# Altium PCB Remote Base.PcbDoc
Units mil, origin at the board's own origin, x right, y up, seen from the top; angles counter-clockwise.
Board outline 1997.02 x 4473.45 mil, 2 copper layers (Top Layer, Bottom Layer); 26 components, 31 nets, 178 pads, 17 vias.
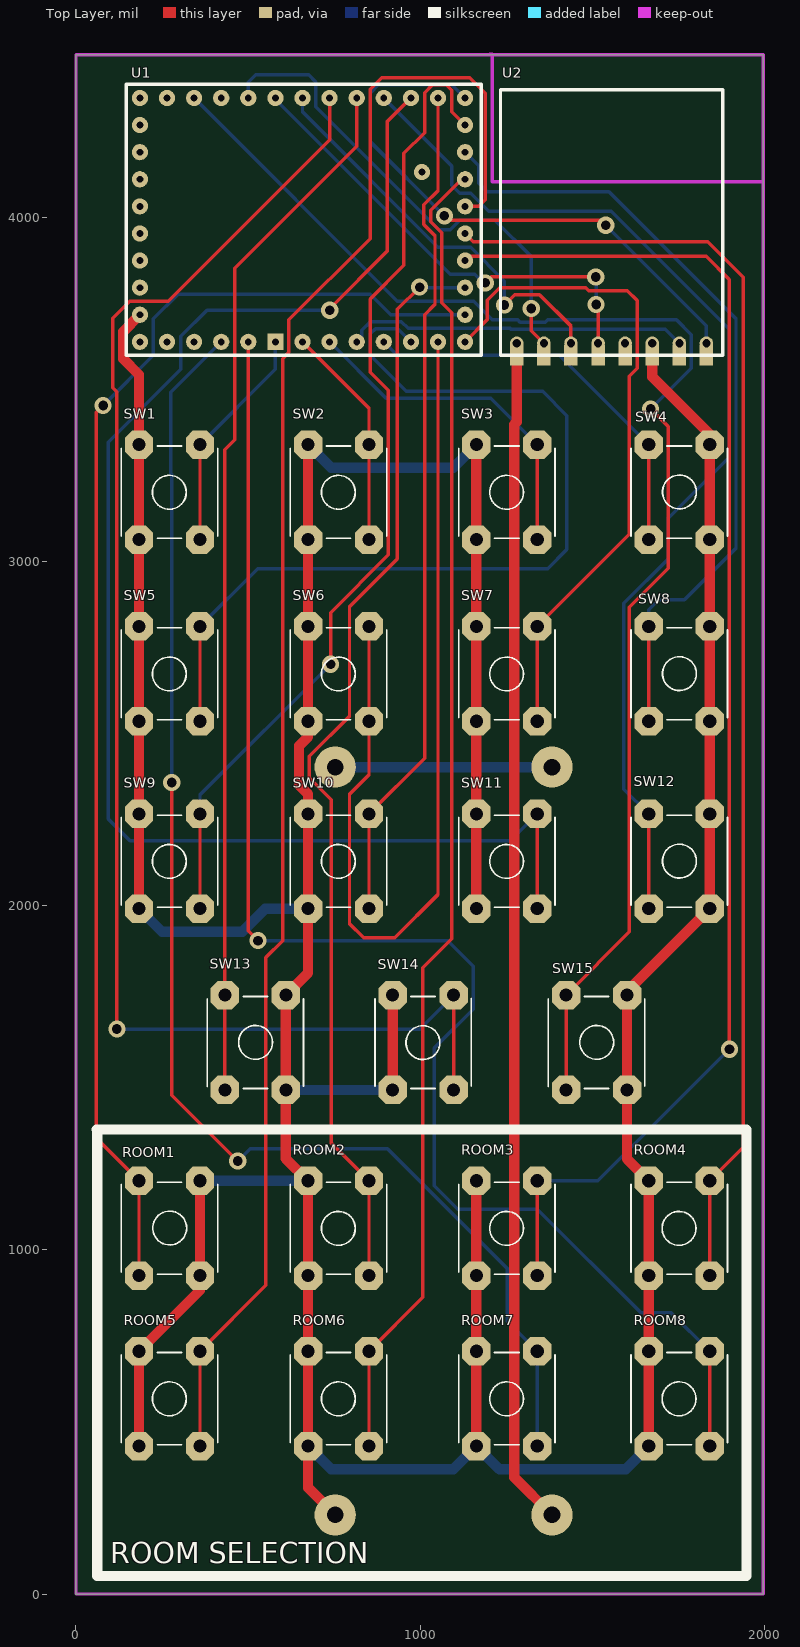
[diagram p0: Top Layer view]
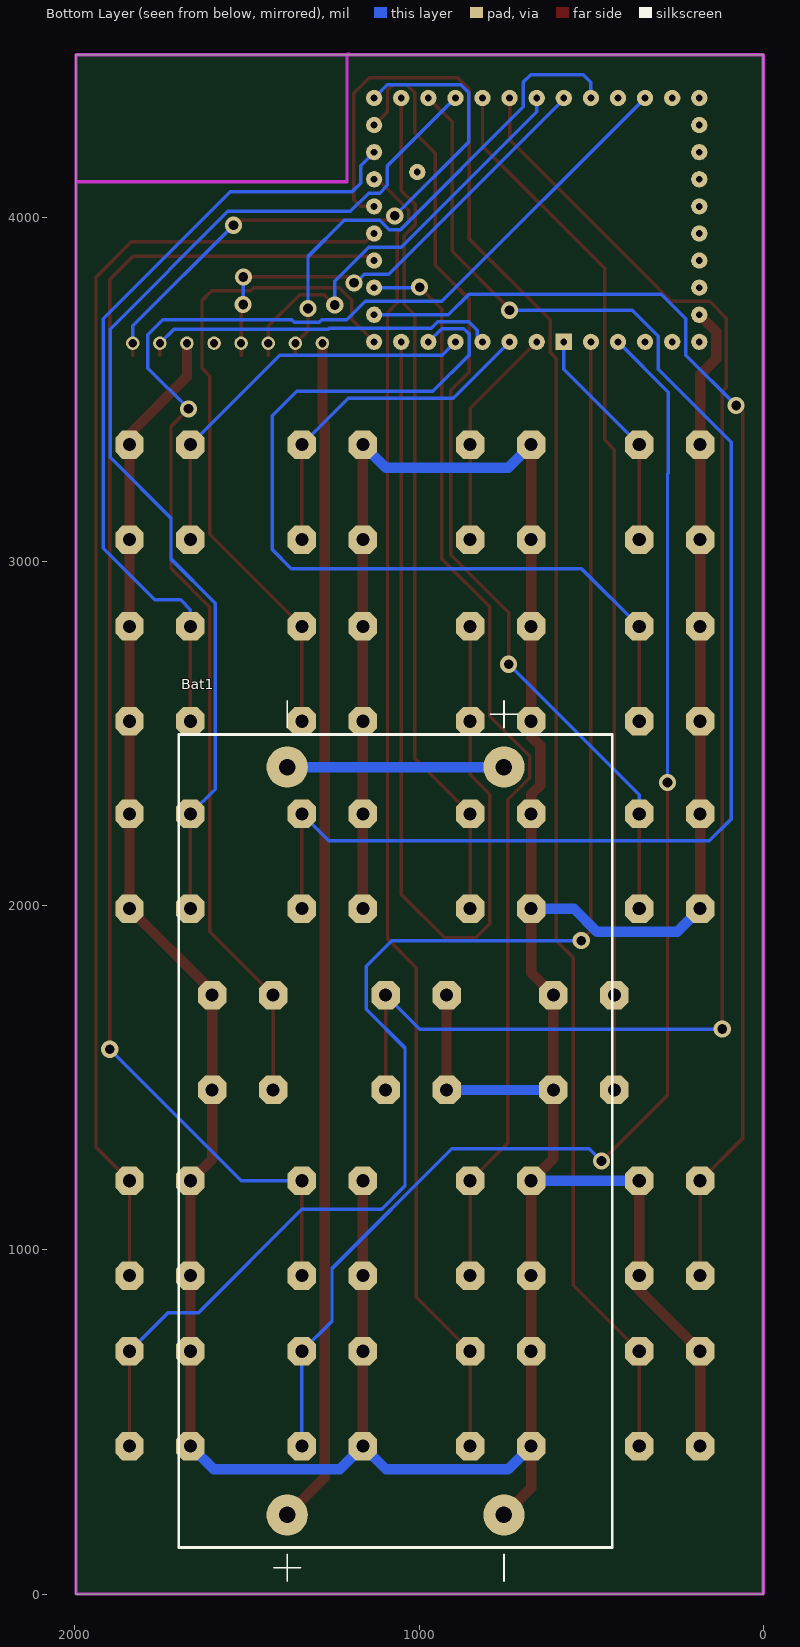
[diagram p1: Bottom Layer view, seen from below]
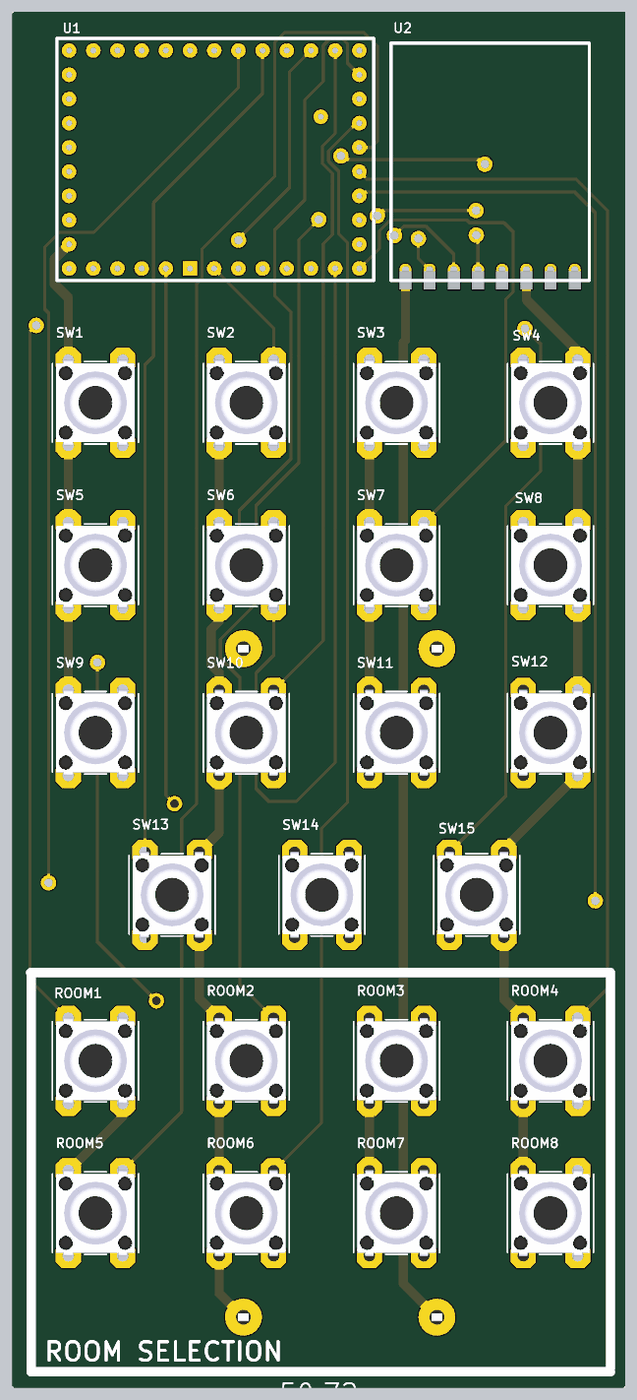
[diagram p2: 3D render of the assembled board from above, using the file's embedded part models]

## Layer stack, top to bottom
Top Solder: solder mask 0.4, Solder Resist, Dk 3.5
Top Layer: signal copper 1.4
Dielectric 1: dielectric 12.6, FR-4, Dk 4.8
Bottom Layer: signal copper 1.4
Bottom Solder: solder mask 0.4, Solder Resist, Dk 3.5

## Board outline
0,0 0,4473.45 1997.02,4473.45 1997.02,0 0,0

## Design rules (kind name [scope] priority, off if disabled: settings)
Clearance [All] p1: gap=10
PolygonConnect [All] p1: connectstyle=Relief reliefconductorwidth=10 reliefentries=4 polygonreliefangle="90 Angle" airgapwidth=10
RoomDefinition "Remote Base" [InComponentClass('Remote Base')] p1: confinementstyle=ConfineIn formatcopy=TRUE lockcomponents=FALSE outline 0,0 1997.02,0 1997.02,4473.45 0,4473.45
RoutingVias [All] p1: holewidth=28 width=50 viastyle="Through Hole" minholewidth=28 minwidth=50 maxholewidth=28 maxwidth=50
SolderMaskExpansion [All] p1: expansion=4
UnpouredPolygon [All] p1: allowunpoured=FALSE
Width POWER [InNet('NetBat1_C1+','NetBat1_C1-','3V','GND')] p1: maxlimit=30 minlimit=10 preferedwidth=30
Width GENERAL [All] p2: maxlimit=20 minlimit=10 preferedwidth=10
29 further rules are at their usual default settings.

## Components (designator, comment, footprint, x,y, rotation, side; value= is the part's Value field where it differs from the comment)
Bat1 "NiMH-AA x 2" BATT_HOLDER_2XAA 1068.26,1316.29 r90 bottom
ROOM1 "Push Button Switch" "Push Button Switch" 271.72,1063.03 r270 top
ROOM2 "Push Button Switch" "Push Button Switch" 762.94,1063.03 r90 top
ROOM3 "Push Button Switch" "Push Button Switch" 1251.89,1063.03 r90 top
ROOM4 "Push Button Switch" "Push Button Switch" 1752.99,1063.03 r90 top
ROOM5 "Push Button Switch" "Push Button Switch" 271.72,567.67 r90 top
ROOM6 "Push Button Switch" "Push Button Switch" 762.94,567.67 r90 top
ROOM7 "Push Button Switch" "Push Button Switch" 1251.89,567.67 r90 top
ROOM8 "Push Button Switch" "Push Button Switch" 1752.99,567.67 r90 top
SW1 "Push Button Switch" "Push Button Switch" 271.72,3201.91 r90 top
SW2 "Push Button Switch" "Push Button Switch" 762.94,3201.91 r90 top
SW3 "Push Button Switch" "Push Button Switch" 1251.89,3201.91 r90 top
SW4 "Push Button Switch" "Push Button Switch" 1752.99,3201.91 r270 top
SW5 "Push Button Switch" "Push Button Switch" 271.72,2674.02 r90 top
SW6 "Push Button Switch" "Push Button Switch" 762.94,2674.02 r90 top
SW7 "Push Button Switch" "Push Button Switch" 1251.89,2674.02 r90 top
SW8 "Push Button Switch" "Push Button Switch" 1752.99,2674.02 r270 top
SW9 "Push Button Switch" "Push Button Switch" 271.72,2129.24 r90 top
SW10 "Push Button Switch" "Push Button Switch" 762.94,2129.24 r90 top
SW11 "Push Button Switch" "Push Button Switch" 1251.89,2129.24 r90 top
SW12 "Push Button Switch" "Push Button Switch" 1752.99,2129.24 r270 top
SW13 "Push Button Switch" "Push Button Switch" 521.17,1602.63 r270 top
SW14 "Push Button Switch" "Push Button Switch" 1008.73,1602.63 r90 top
SW15 "Push Button Switch" "Push Button Switch" 1512.68,1602.63 r270 top
U1 "STM8L052C6 Board" "STM8L052C6 BOARD" 145.87,3599.69 r0 top
U2 "CC2500" CC2500 1280.87,3634.69 r0 top

## Footprints (in the part's own frame and the unit in brackets; to place one, negate y for a bottom-side part, rotate by r counter-clockwise, add the part's x,y. Pads: shape width x height; smd on the part's side, far side on the other; paste and mask are expansions set on the pad)
BATT_HOLDER_2XAA [mil] "2-cell AA battery holder"
  round 120 hole 48: C1+(-1086.61,314.96) C1-(1086.61,314.96) C2+(1086.61,-314.96) C2-(-1086.61,-314.96)
  silkscreen extent -1280,-630 1280,630, body extent -1181,-630 1181,630, height 657
CC2500 [mm]
  rect 1x1.5 smd: 1(0,-0.889) 2(2,-0.889) 3(4,-0.889) 4(6,-0.889) 5(8,-0.889) 6(10,-0.889) 7(12,-0.889) 8(14,-0.889)
  round 1 hole 0.6: 1(0,0) 2(2,0) 3(4,0) 4(6,0) 5(8,0) 6(10,0) 7(12,0) 8(14,0)
  silkscreen extent -1.2,-0.89 15.2,18.71
"Push Button Switch" [mm]
  round 0.508 on Mech15: 0(0,0)
  oct 2.1x2.1 hole 0.965: 1(-3.5,-2.25) 2(-3.5,2.25) 3(3.5,2.25) 4(3.5,-2.25)
  silkscreen extent -3.4,-3.56 3.4,3.56, body extent -4.13,-3.25 4.13,3.25, height 5
"STM8L052C6 BOARD" [mm]
  rect 1.2x1.2 hole 0.5: 1(11.014,0.987)
  round 1.2 hole 0.5: 2(13.014,0.987) 3(15.014,0.987) 4(17.014,0.987) 5(19.014,0.987) 6(21.014,0.987) 7(23.014,0.987) 8(25.014,0.987) 9(25.014,2.987) 10(25.014,4.987) 11(25.014,6.987) 12(25.014,8.987) 13(25.014,10.987) 14(25.014,12.987) 15(25.014,14.987) 16(25.014,16.987) 17(25.014,18.987) 18(23.014,18.987) 19(21.014,18.987) 20(19.014,18.987) 21(17.014,18.987) 22(15.014,18.987) 23(13.014,18.987) 24(11.014,18.987) 25(9.014,18.987) 26(7.014,18.987) 27(5.014,18.987) 28(3.014,18.987) 29(1.014,18.987) 30(1.014,16.987) 31(1.014,14.987) 32(1.014,12.987) 33(1.014,10.987) 34(1.014,8.987) 35(1.014,6.987) 36(1.014,4.987) 37(1.014,2.987) 38(1.014,0.987) 39(3.014,0.987) 40(5.014,0.987) 41(7.014,0.987) 42(9.014,0.987) 43(21.827,13.518)
  silkscreen extent 0,0 26.21,19.99

## Part data
Bat1: library part BATT_AAx2_Holder, "Battery holder 2xAA PCB mount"

## Via types
v1: diameter 50, hole 28, Top Layer to Bottom Layer, 17 vias

## Nets (pads, with @x,y where several pads share a name; then routed paths per layer and width w, separated by ;. In a path a pad name is that pad's centre, name@x,y a point inside that pad or via, vN(x,y) a via of type N, cw(c..) or ccw(c..) an arc to the next point about the centre after c; other vN are vias at no path point)
3V: Bat1.C1+ U2.1 | length 3453.2
  Top Layer w30: U2.1@1280.87,3634.69 1280.87,3599.69 1280.87,3405.69 1273.87,3398.69 1273.87,339.03 Bat1.C1+
CSN: U1.17 U2.8 | length 1726.9
  Top Layer w10: v1(1070.52,4004.54) 1082.94,3992.13 1524.79,3992.13 v1(1539.3,3977.62) ; U2.8@1832.05,3599.69 U2.8@1832.05,3634.68
  Bottom Layer w10: v1(1070.52,4004.54) 855.83,4219.23 855.83,4363.2 878.45,4385.83 1092.05,4385.83 U1.17 ; v1(1539.3,3977.62) 1832.05,3684.87 U2.8@1832.05,3634.69
GDO0: U1.4 U2.7 | length 1033.6
  Top Layer w10: U2.7@1753.31,3599.69 U2.7@1753.31,3634.68
  Bottom Layer w10: U1.4 830.64,3653.47 830.64,3671.94 855.87,3697.17 945.59,3697.17 965.07,3677.69 1261.31,3677.69 1263.31,3675.69 1712.31,3675.69 U2.7@1753.31,3634.69
GND: Bat1.C2- ROOM1.2 ROOM1.3 ROOM2.2 ROOM2.3 ROOM3.2 ROOM3.3 ROOM4.2 ROOM4.3 ROOM5.2 ROOM5.3 ROOM6.2 ROOM6.3 ROOM7.2 ROOM7.3 ROOM8.2 ROOM8.3 SW1.2 SW1.3 SW2.2 SW2.3 SW3.2 SW3.3 SW4.2 SW4.3 SW5.2 SW5.3 SW6.2 SW6.3 SW7.2 SW7.3 SW8.2 SW8.3 SW9.2 SW9.3 SW10.2 SW10.3 SW11.2 SW11.3 SW12.2 SW12.3 SW13.2 SW13.3 SW14.2 SW14.3 SW15.2 SW15.3 U1.37 U2.6 | length 14438.7
  Top Layer w30: ROOM5.2 ROOM5.3 360.3,882.64 ROOM1.3 ROOM1.2 ; SW9.2 SW9.3 SW5.2 SW5.3 SW1.2 SW1.3 183.14,3543.42 136.87,3589.69 136.87,3668.36 U1.37 ; SW2.3 SW2.2 SW6.3 SW6.2 674.36,2490.8 648.3,2464.74 648.3,2350.01 674.36,2323.96 SW10.3 SW10.2 674.36,1805.03 SW13.2 SW13.3 609.75,1265.43 ROOM2.3 ROOM2.2 ROOM6.3 ROOM6.2 674.36,308.62 Bat1.C2- ; SW14.2 SW14.3 ; ROOM7.2 ROOM7.3 ROOM3.2 ROOM3.3 ; SW11.2 SW11.3 SW7.2 SW7.3 SW3.2 SW3.3 ; ROOM8.2 ROOM8.3 ROOM4.2 ROOM4.3 1601.26,1263.97 SW15.3 SW15.2 1601.26,1751.13 SW12.3 SW12.2 SW8.3 SW8.2 SW4.3 SW4.2 1841.57,3370.24 1674.57,3537.24 1674.57,3599.69 U2.6@1674.57,3634.69
  Bottom Layer w30: SW9.2 249.9,1924.69 483.11,1924.69 549.87,1991.44 SW10.2 ; ROOM1.2 ROOM2.3 ; SW13.3 SW14.2 ; ROOM6.2 741.55,362.69 1096.12,362.69 ROOM7.2 1230.5,362.69 1597.21,362.69 ROOM8.2 ; SW2.3 741.38,3272.69 1096.29,3272.69 SW3.3
NetBat1_C1-: Bat1.C1- Bat1.C2+ | length 629.9
  Bottom Layer w30: Bat1.C2+ Bat1.C1-
ROOM1: ROOM1.1 ROOM1.4 U1.9 | length 3860.9
  Top Layer w10: v1(78.87,3453.69) 58.87,3433.69 58.87,1325.09 ROOM1.1 ROOM1.4
  Bottom Layer w10: v1(78.87,3453.69) 224.87,3599.69 224.87,3705.69 296.35,3777.17 854.87,3777.17 914.75,3717.28 U1.9
ROOM2: ROOM2.1 ROOM2.4 U1.10 | length 3209.7
  Top Layer w10: ROOM2.1 ROOM2.4 741.87,1310.48 741.87,2308.27 678.3,2371.83 678.3,2434.12 794.87,2550.69 794.87,2868.69 933.87,3007.69 933.87,3733.02 v1(998.53,3797.69)
  Bottom Layer w10: v1(998.53,3797.69) 1000.19,3796.02 U1.10
ROOM3: ROOM3.1 ROOM3.4 U1.11 | length 4030.3
  Top Layer w10: U1.11 1143.11,3887.2 1831.36,3887.2 1898.87,3819.69 v1(1898.87,1582.94) ; ROOM3.1 ROOM3.4
  Bottom Layer w10: ROOM3.4 1516.75,1200.83 v1(1898.87,1582.94)
ROOM4: ROOM4.1 ROOM4.4 U1.12 | length 3802.5
  Top Layer w10: U1.12 1154.79,3929.39 1836.17,3929.39 1938.87,3826.69 1938.87,1298.13 ROOM4.4 ROOM4.1
ROOM5: ROOM5.1 ROOM5.4 U1.13 | length 4890.6
  Top Layer w10: ROOM5.1 ROOM5.4 551.87,897.04 551.87,1849.69 600.87,1898.69 600.87,3589.69 618.87,3607.69 618.87,3702.69 854.87,3938.69 854.87,4372.69 888.01,4405.83 1144.73,4405.83 1189.3,4361.26 1189.3,4051.62 1169.93,4032.25 U1.13
ROOM6: ROOM6.1 ROOM6.4 U1.14 | length 3853.6
  Top Layer w10: ROOM6.1 ROOM6.4 1007.87,861.82 1007.87,1819.69 1091.87,1903.69 1091.87,3723.5 1063.29,3752.08 1063.29,3955.21 1030.52,3987.97 1030.52,4021.11 1120.4,4110.99 U1.14
ROOM7: ROOM7.1 ROOM7.4 U1.41 | length 4016
  Top Layer w10: v1(278.13,2357.96) 278.13,1449.95 v1(469.99,1258.09)
  Bottom Layer w10: v1(278.13,2357.96) 278.13,3254.11 275.68,3256.56 275.68,3492.21 U1.41 ; v1(469.99,1258.09) 505.82,1293.92 905.23,1293.92 1253.14,946.01 1253.14,792.81 ROOM7.4 ROOM7.1
ROOM8: ROOM8.1 ROOM8.4 U1.42 | length 4367.7
  Top Layer w10: U1.42 500.75,1926.8 v1(528.87,1898.69) ; ROOM8.1 ROOM8.4
  Bottom Layer w10: v1(528.87,1898.69) 1079.87,1898.69 1153.87,1824.69 1153.87,1699.69 1040.87,1586.69 1040.87,1186.56 1108.93,1118.5 1340.44,1118.5 1642.25,816.69 1730.35,816.69 ROOM8.4
SCLK: U1.23 U2.3 | length 1229.1
  Top Layer w10: v1(1244.83,3745.69) 1275.17,3776.03 1346.96,3776.03 1438.35,3684.64 1438.35,3634.69 U2.3@1438.35,3599.69
  Bottom Layer w10: U1.23 658.23,4306.73 1051.57,3913.39 1146.67,3913.39 1244.83,3815.23 v1(1244.83,3745.69)
SI: U1.25 U2.2 | length 1462.7
  Top Layer w10: v1(1322.87,3735.69) 1322.87,3671.43 1359.61,3634.69 U2.2@1359.61,3599.69
  Bottom Layer w10: U1.25 500.75,4392.72 522.72,4414.69 675.87,4414.69 696.87,4393.69 696.87,4321.63 1053.95,3964.54 1087.09,3964.54 1114.68,3992.13 1217.43,3992.13 1322.87,3886.69 v1(1322.87,3735.69)
SO: U1.24 U2.4 | length 1393.4
  Top Layer w10: v1(1189.3,3809.98) 1206.52,3827.2 v1(1510.64,3827.2) ; v1(1511.38,3747.2) 1517.09,3741.49 1517.09,3634.69 U2.4@1517.09,3599.69
  Bottom Layer w10: U1.24 579.49,4343.04 1087.89,3834.65 1158.84,3834.65 1183.51,3809.98 v1(1189.3,3809.98) ; v1(1510.64,3827.2) 1511.38,3826.46 v1(1511.38,3747.2)
SW1: SW1.1 SW1.4 U1.1 | length 665.2
  Top Layer w10: SW1.1 SW1.4
  Bottom Layer w10: SW1.4 579.49,3558.89 U1.1
SW2: SW2.1 SW2.4 U1.2 | length 654.5
  Top Layer w10: U1.2 851.52,3445.25 SW2.4 SW2.1
SW3: SW3.1 SW3.4 U1.3 | length 1002.9
  Top Layer w10: SW3.1 SW3.4
  Bottom Layer w10: U1.3 900.83,3474.69 1205.49,3474.69 SW3.4
SW4: SW4.1 SW4.4 U1.5 | length 1169.3
  Top Layer w10: SW4.4 SW4.1
  Bottom Layer w10: U1.5 933.31,3599.69 1404.42,3599.69 SW4.1
SW5: SW5.1 SW5.4 U1.6 | length 2670.5
  Top Layer w10: SW5.1 SW5.4
  Bottom Layer w10: SW5.4 528.17,2979.69 1371.14,2979.69 1426.64,3035.19 1426.64,3423.91 1355.87,3494.69 959.87,3494.69 854.87,3599.69 854.87,3661.69 870.35,3677.17 934.57,3677.17 U1.6
SW6: SW6.1 SW6.4 U1.7 | length 2819.7
  Top Layer w10: SW6.4 SW6.1 851.52,2380.34 794.87,2323.69 794.87,1947.69 835.87,1906.69 925.87,1906.69 1051.93,2032.75 U1.7
SW7: SW7.1 SW7.4 U1.8 | length 1956.6
  Top Layer w10: U1.8 1195.57,3703.44 1195.57,3759.69 1231.92,3796.03 1480.8,3796.03 1489.63,3787.2 1602.36,3787.2 1630.87,3758.69 1630.87,3561.69 1607.87,3538.69 1607.87,3079.21 SW7.4 SW7.1
SW8: SW8.1 SW8.4 U1.15 | length 2336
  Top Layer w10: SW8.4 SW8.1
  Bottom Layer w10: U1.15 1169.87,4150.53 1169.87,4099.69 1194.87,4074.69 1548.87,4074.69 1917.91,3705.65 1917.91,3038.72 1768.25,2889.07 1692.99,2889.07 1664.4,2860.48 SW8.1
SW9: SW9.1 SW9.4 U1.16 | length 2898.2
  Top Layer w10: SW9.1 SW9.4 ; v1(739.87,2701.69) 739.87,2851.69 907.87,3019.69 907.87,3497.69 854.87,3550.69 854.87,3763.15 952.87,3861.15 952.87,4186.69 1012.87,4246.69 1012.87,4362.83 1035.87,4385.83 1075.87,4385.83 1091.87,4369.83 1091.87,4307.27 U1.16
  Bottom Layer w10: SW9.4 360.3,2322.12 v1(739.87,2701.69)
SW10: SW10.1 SW10.4 U1.18 | length 2465.9
  Top Layer w10: SW10.1 SW10.4 1012.87,2428.38 1012.87,3717.69 1043.29,3748.11 1043.29,3946.92 1010.52,3979.69 1010.52,4036.49 1051.93,4077.9 U1.18
SW11: SW11.1 SW11.4 U1.19 | length 4249.6
  Top Layer w10: v1(737.25,3730.69) 737.25,3735.06 903.87,3901.69 903.87,4277.88 U1.19 ; SW11.1 SW11.4
  Bottom Layer w10: v1(737.25,3730.69) 380.79,3730.69 304.65,3654.54 304.65,3558.47 93.51,3347.33 93.51,2252.08 156.95,2188.65 1262.08,2188.65 SW11.4
SW12: SW12.1 SW12.4 U1.20 | length 3155.1
  Top Layer w10: SW12.4 SW12.1
  Bottom Layer w10: U1.20 1092.05,4149.61 1092.05,4093.49 1114.68,4070.87 1146.67,4070.87 1199.92,4017.62 1555.86,4017.62 1897.91,3675.58 1897.91,3302.72 1720.87,3125.69 1720.87,3007.69 1592.32,2879.13 1592.32,2339.12 SW12.1
SW13: SW13.1 SW13.4 U1.21 | length 3041.1
  Top Layer w10: SW13.4 SW13.1 432.59,3325.4 460.87,3353.69 460.87,3852.69 815.71,4207.53 U1.21
SW14: SW14.1 SW14.4 U1.22 | length 4332
  Top Layer w10: v1(118.87,1641.69) 118.87,3493.69 106.87,3505.69 106.87,3707.69 155.87,3756.69 267.87,3756.69 736.97,4225.79 U1.22 ; SW14.1 SW14.4
  Bottom Layer w10: v1(118.87,1641.69) 998.57,1641.69 SW14.4
SW15: SW15.1 SW15.4 U1.27 | length 4123.1
  Top Layer w10: SW15.4 SW15.1 1607.87,1924.2 1607.87,2867.69 1720.87,2980.69 1720.87,3392.69 v1(1669.87,3443.69)
  Bottom Layer w10: U1.27 933.79,3756.69 1155.87,3756.69 1209.87,3702.69 1283.31,3702.69 1290.31,3695.69 1363.31,3695.69 1370.31,3702.69 1745,3702.69 1788,3659.69 1788,3561.81 v1(1669.87,3443.69)
pads on no net: ROOM1.0 ROOM2.0 ROOM3.0 ROOM4.0 ROOM5.0 ROOM6.0 ROOM7.0 ROOM8.0 SW1.0 SW2.0 SW3.0 SW4.0 SW5.0 SW6.0 SW7.0 SW8.0 SW9.0 SW10.0 SW11.0 SW12.0 SW13.0 SW14.0 SW15.0 U1.26 U1.28 U1.29 U1.30 U1.31 U1.32 U1.33 U1.34 U1.35 U1.36 U1.38 U1.39 U1.40 U1.43 U2.5

## Keep-outs
Keep-Out Layer:
  lines w10: 1202.72,4475.09 1209.52,4475.09 1209.52,4103.74 1995.73,4103.74 ; 0,0 0,4473.45 1997.02,4473.45 1997.02,0 0,0

## Silkscreen, mask and mechanical layers (free items; w line width, h text height)
Top Overlay:
  lines w30: 60.17,1349.83 1948.37,1349.83 1948.37,52.22 62.06,52.22 62.06,1349.83 60.17,1349.83
  text "ROOM SELECTION" at 99.85,89.71 h60

## Dimensions
0,0 to 0,4473.45 on Top Overlay
0,0 to 1997.02,0 on Top Overlay